# EAGLE board ajuste-sensor-temperatura2 (EAGLE 8.1.1)
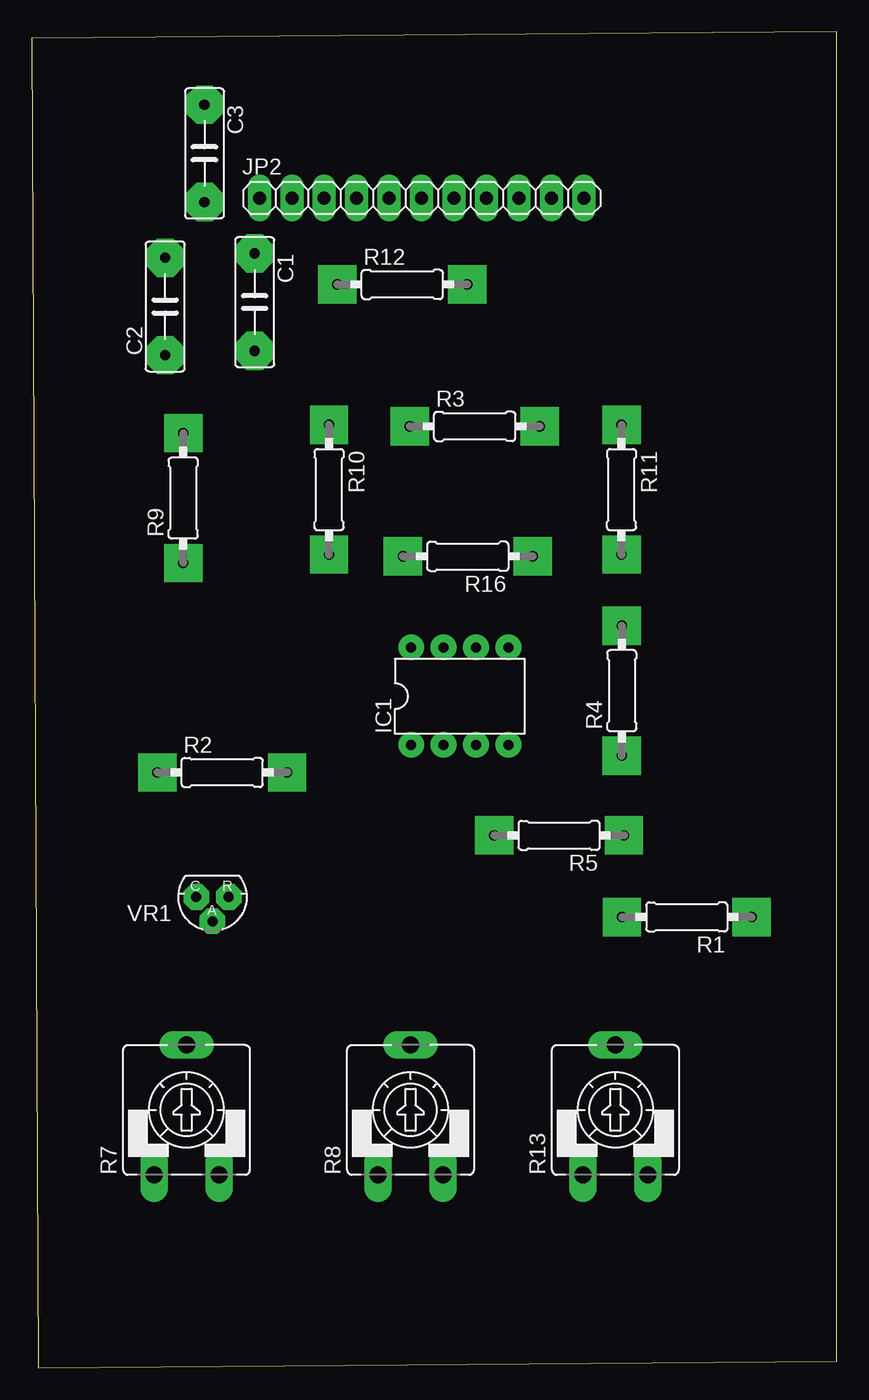
[diagram p0: board, top side]
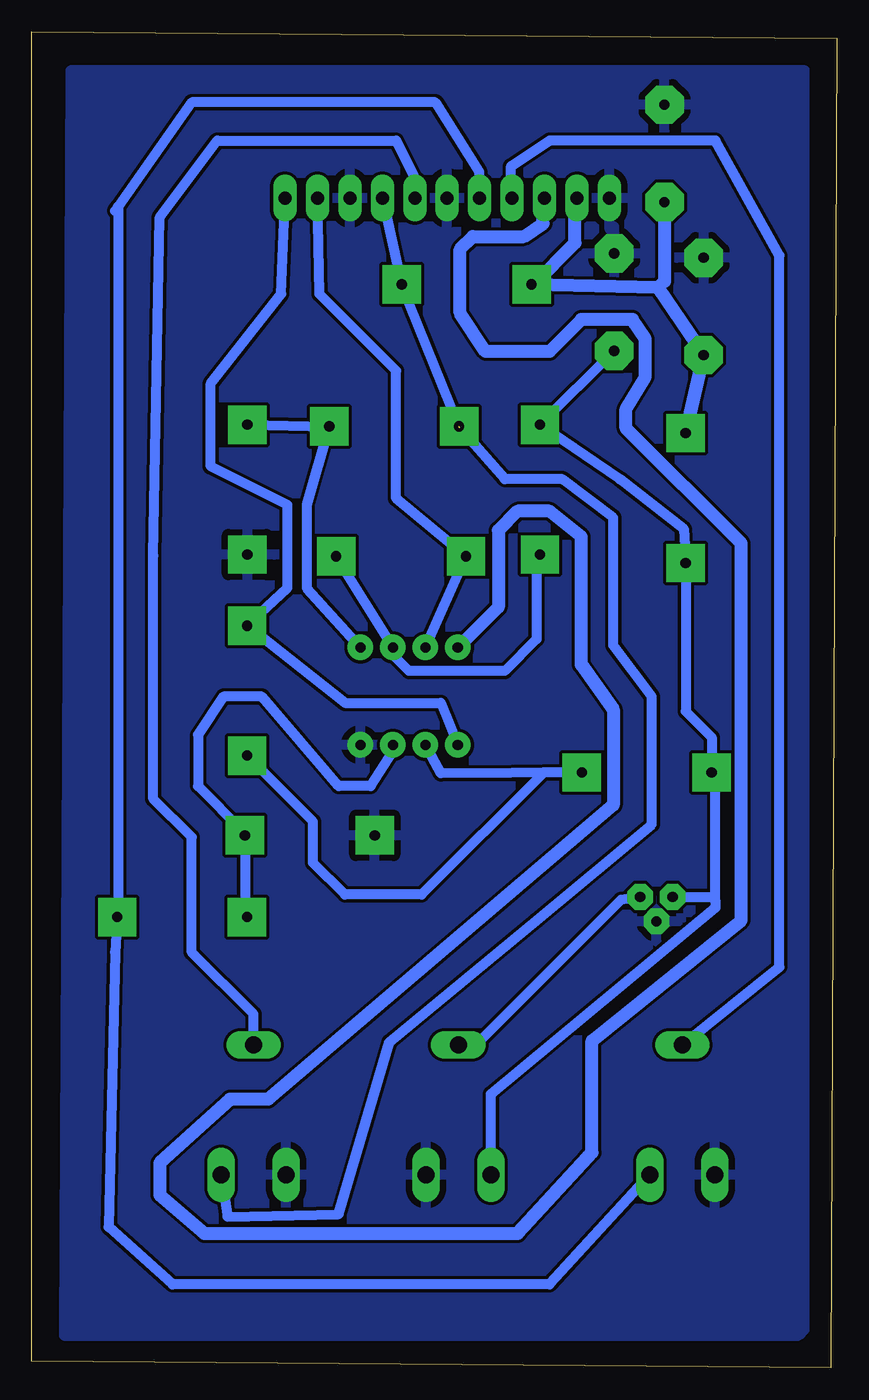
[diagram p1: board, bottom side, seen from below]

Size 63 x 104.5 mm. Coordinates in mm from the lower left corner, seen from the top.
Outline: 0.5,0 63,0.5 63,104.5 0,104 0.5,0
Copper layers (1*16): Top 0.035mm / dielectric 1.5mm / Bottom 0.035mm
Design rules "ajuste-sensor-temperatura *": minimum track width 10mil, minimum drill 0.8mm, track to track 0.25mm, track to pad 0.25mm, pad to pad 0.25mm, via to via 0.25mm, smd to smd 0.25mm, copper to edge 40mil, drill to drill 0.8mm, minimum pad ring 16mil, minimum via ring 8mil, stop-mask expansion 4mil, vias tented up to drill 0mil, thermal gap 20mil

## Footprints (pad centres in the part's own frame; a part is rotated, then mirrored left to right if it is on the bottom)
C7.5B3 = drill 0.8 pad 3 octagon: 1 -3.81,0; 2 3.81,0
DIL08 = drill 0.8 pad 2: 1 -3.81,-3.81; 2 -1.27,-3.81; 3 1.27,-3.81; 4 3.81,-3.81; 5 3.81,3.81; 6 1.27,3.81; 7 -1.27,3.81; 8 -3.81,3.81
1X11 = drill 1.016 long: 1 -12.7,0; 2 -10.16,0; 3 -7.62,0; 4 -5.08,0; 5 -2.54,0; 6 0,0; 7 2.54,0; 8 5.08,0; 9 7.62,0; 10 10.16,0; 11 12.7,0
0207/10 = drill 0.8 pad 3 square: 1 -6.35,0; 2 3.81,0
CA9V = drill 1.321 long: A -2.54,-5.08; E 2.54,-5.08; S 0,5.08
TO92-CLP = drill 0.8 pad 2 octagon: A 0,1.905; C 1.27,0; R -1.27,0

## Placement (x,y rotation side)
C1  0.01n  [C7.5B3]  17.43,83.36 270 top
C2  0.01n  [C7.5B3]  10.43,83.02 90 top
C3  0.01n  [C7.5B3]  13.5,95 270 top
IC1  MCP602P  [DIL08]  33.48,52.53 0 top
JP2  [1X11]  30.5,91.5 0 top
R1  33k  [0207/10]  49.98,35.25 180 top
R2  33k  [0207/10]  16.16,46.56 0 top
R3  33k  [0207/10]  35.92,73.64 0 top
R4  100k  [0207/10]  46.16,54.23 90 top
R5  100k  [0207/10]  39.98,41.64 180 top
R7  10k  [CA9V]  12.1,20.16 0 top
R8  100  [CA9V]  29.63,20.16 0 top
R9  120  [0207/10]  11.84,69.3 90 top
R10  33k  [0207/10]  23.25,67.42 270 top
R11  100k  [0207/10]  46.14,67.42 270 top
R12  330  [0207/10]  30.25,84.74 0 top
R13  10k  [CA9V]  45.66,20.16 0 top
R16  100k  [0207/10]  32.84,63.47 180 top
VR1  2.5V  [TO92-CLP]  14.13,36.82 180 top

## Library data of the parts
C1 C3 = capacitor-wima
C2 = capacitor-wima; C1: 0.01n
IC1 = linear
JP2 = pinhead
R1-R5 R9-R12 R16 = eagle-ltspice; SPICEMODEL: NONE; SPICEPREFIX: R
R7 R8 R13 = pot
VR1 = v-reg

## Nets
AGND: C1.1 C2.2 C3.1 IC1.4 JP2.1 JP2.6 JP2.9 R5.2 R7.A R8.E R11.2 R13.A VR1.A
N$1: IC1.3 R1.2 R5.1
N$2: IC1.2 R2.2 R4.1
N$4: JP2.5 R1.1 R7.E
N$5: JP2.4 R7.S
N$6: R8.S VR1.R
N$8: IC1.5 R3.2 R11.1
N$9: IC1.6 R10.2 R16.1
N$10: JP2.8 R3.1 R12.2 R13.E
N$11: JP2.7 R13.S
N$13: C1.2 R2.1 R8.A R9.1 R10.1 VR1.C
OUT$1: IC1.1 JP2.11 R4.2
OUT$2: IC1.7 JP2.10 R16.2
S$1: C2.1 C3.2 JP2.2 R9.2 R12.1
VCC: IC1.8 JP2.3

## Tracks (layer width: path | path; a pad name or v marks a point on that pad's centre or on a via)
AGND
  pour Bottom: 2.5,101.5 60,101.5 60.5,2.5 3,2.5 2.5,3
N$1
  Bottom 0.8: R1.2 46.33,35.41 R5.1 46.5,41.81 46.5,42 50,45.5 50,49.5 48,52.5 45,52.5 39,45.5 36.5,45.5 34.75,48.25 IC1.3
N$2
  Bottom 0.8: 20,46.5 R2.2 | R2.2 31,46.5 IC1.2 | R2.2 22.94,46.56 32.5,37 38.5,37 41,39.5 41,42.72 R4.1
N$4
  Bottom 0.8: R7.E 22.5,6.5 52,6.5 57,11 56.5,32.5 R1.1 56.26,35.32 56.26,90.83 | JP2.5 27.98,91.52 27.98,93.54 31.44,99 50.5,99 56.26,90.83 | 56.26,90.83 56.5,90.5
N$5
  Bottom 0.8: R7.S 4.5,31.34 4.5,87 9.5,96 22.5,96 25.5,94 25.5,91.5 JP2.4
N$6
  Bottom 0.8: VR1.R 16.9,36.6 28,25.5 29.87,25.5 R8.S
N$8
  Bottom 0.8: R11.1 R3.2 41.5,67.5 41.5,61 IC1.5
N$9
  Bottom 0.8: R16.1 IC1.6 34.75,55.75 33.5,54.5 26,54.5 23.5,57 23.5,63.36 R10.2
N$10  (1 unrouted)
  Bottom 0.8: JP2.8 R12.2 R3.1 | R13.E 47.7,11.8 39,12 35,25.5 23.5,35 14.5,42.5 14.5,52.5 17.5,56.5 17.5,66.5 21.5,69.5 26,69.5 29.5,73.5
N$11
  Bottom 0.8: JP2.7 33.04,93.04 34.5,96 48.5,96 53,90 53.5,63.5 53.5,44.5 50.5,41.5 50.5,32.5 45.66,27.66 R13.S
N$13
  Bottom 0.8: C1.2 R10.1 17,69.5 12,65.61 R9.1 11.84,51.34 9.81,49.31 R2.1 | R8.A 27.09,21.41 9.5,36 9.5,36.5 | 10,45.87 R2.1 | 10,46.37 R2.1 | 9.5,36.5 9.5,46.25 R2.1 | VR1.C 9.82,36.82 9.5,36.5
OUT$1
  Bottom 0.8: IC1.1 31,52 38.5,52 R4.2 43,61 43,67.5 49,70.5 49,77 43.5,84 JP2.11
OUT$2
  Bottom 0.8: IC1.7 R16.2 34.5,68 34.5,78 40.5,84 JP2.10
S$1
  Bottom 1: JP2.2 20.5,91.34 20.5,88 23.76,84.74 R12.1 14,84.5 | C3.2 13.5,85 14,84.5 | 14,84.5 C2.1 R9.2
VCC
  Bottom 1: IC1.8 26.5,59.5 26.5,65.5 25,67 22.5,67 20,65 20,55 17.5,51.5 17.5,44 44.5,21 47.5,21 53,16 53,13.5 49.5,10.5 25,10.5 19.5,16.5 19.17,16.83 19.17,25.57 7.5,35 7.5,64.5 16.5,73.5 16.5,75 15,77.5 15,80.5 16,82 20,82 22.5,79.5 27.5,79.5 29.5,82.5 29.5,87.5 28.5,88.5 24.5,88.5 23,89.5 23,91.38 JP2.3